# Altium PCB rf-mixer.PcbDoc
Units mil, origin at the board's own origin, x right, y up, seen from the top; angles counter-clockwise.
Board outline 1102.36 x 866.14 mil, 2 copper layers (Top Layer, Bottom Layer), stack 65.792 mil thick; 18 components, 13 nets, 57 pads, 49 vias.
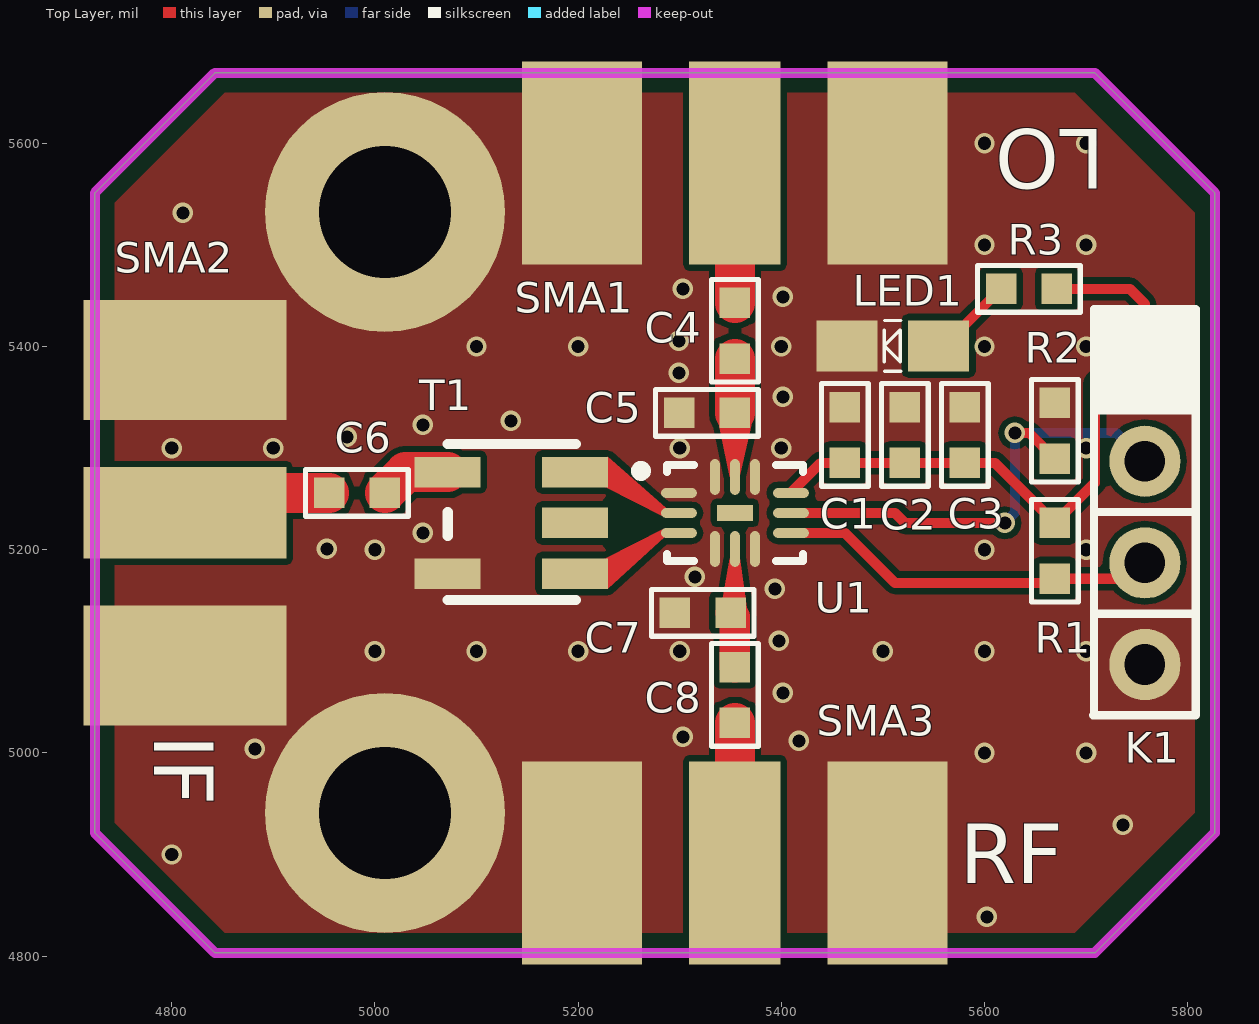
[diagram p0: Top Layer view]
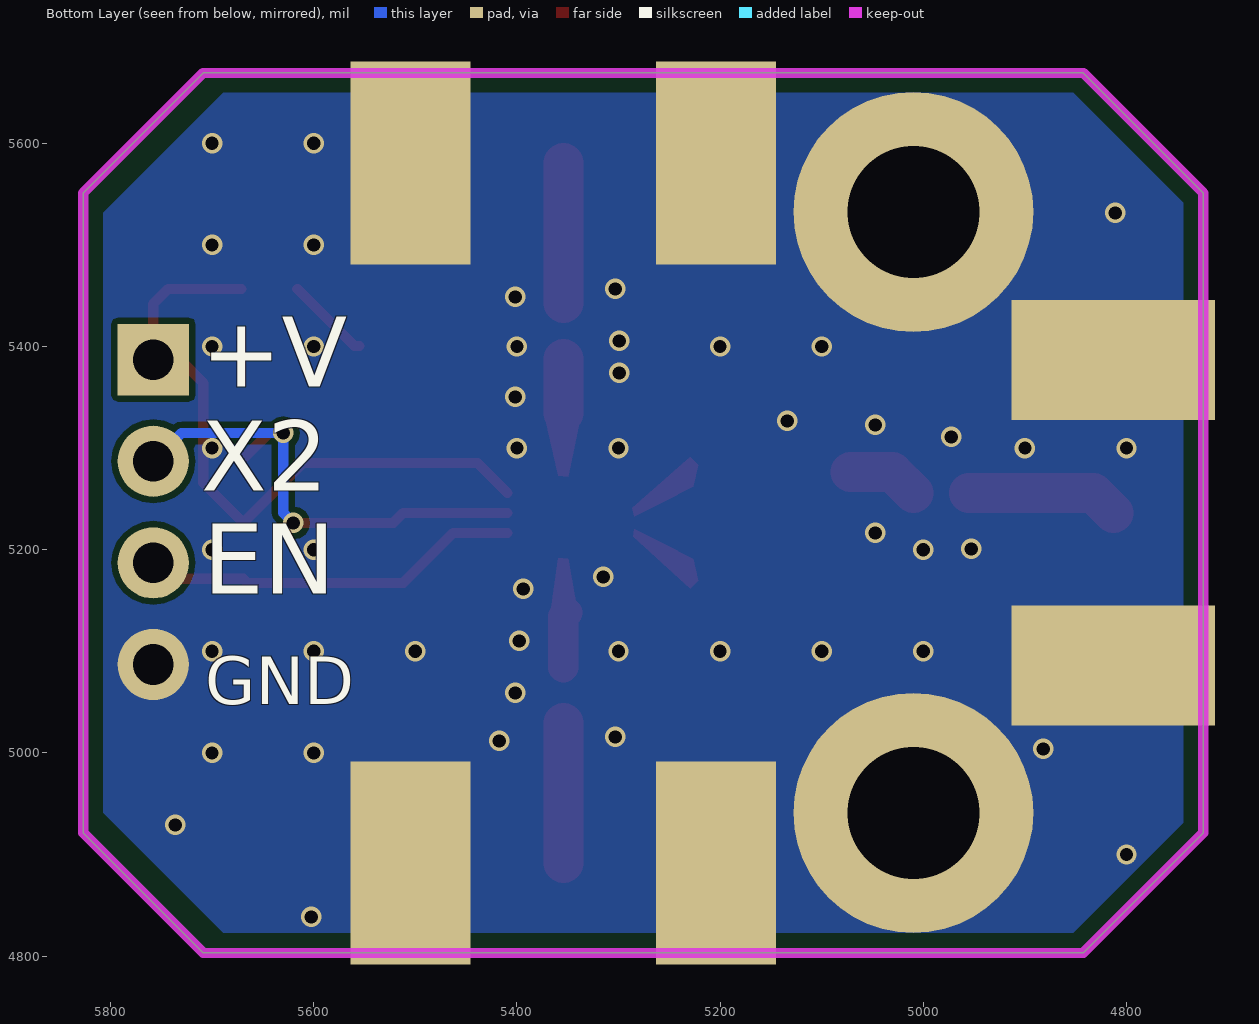
[diagram p1: Bottom Layer view, seen from below]

## Layer stack, top to bottom
Top Solder: solder mask 0.4, Solder Resist, Dk 3.5
Top Layer: signal copper 1.4
Dielectric 1: dielectric 62.9921, FR-4, Dk 4.8
Bottom Layer: signal copper 1.4
Bottom Solder: solder mask 0.4, Solder Resist, Dk 3.5

## Board outline
4724.41,4921.26 4724.41,5551.18 4842.52,5669.29 5708.66,5669.29 5826.77,5551.18 5826.77,4921.26 5708.66,4803.15 4842.52,4803.15

## Design rules (kind name [scope] priority, off if disabled: settings)
Clearance [All] p1: gap=6 ignorepadtopadclearanceinfootprint=FALSE except(0: Arc-Hole Track-Hole SMDPad-Hole THPad-Hole Via-Hole Fill-Hole Poly-Hole Region-Hole Text-Hole)
HoleSize [All] p1: absolutevalues=TRUE maxlimit=248.03 minlimit=39.37 maxpercent=80.000 minpercent=20.000
PlaneConnect [All] p1: planeconnectstyle=Direct reliefexpansion=20 reliefentries=4 reliefconductorwidth=10 reliefairgap=10
PolygonConnect [All] p1: connectstyle=Direct reliefconductorwidth=10 reliefentries=4 polygonreliefangle="90 Angle" airgapwidth=10
RoutingVias [All] p1: holewidth=13 width=20 viastyle="Through Hole" minholewidth=13 minwidth=20 maxholewidth=60 maxwidth=60
SolderMaskExpansion [All] p1: expansion=4
Width [All] p1: maxlimit=1000 minlimit=4 preferedwidth=10
28 further rules are at their usual default settings.

## Components (designator, comment, footprint, x,y, rotation, side; value= is the part's Value field where it differs from the comment)
C1 "1nF" 0603C-GENERIC 5462.6,5340.43 r270 top
C2 "10pF" 0603C-GENERIC 5521.65,5340.43 r270 top
C3 "1nF" 0603C-GENERIC 5580.71,5340.43 r270 top
C4 "10pF" 0603C-GENERIC 5354.33,5387.91 r90 top
C5 "0.15pF" 0603C-GENERIC 5299.33,5334.65 r0 top
C6 "10pF" 0603C-GENERIC 5009.84,5255.91 r180 top
C7 "0.15pF" 0603C-GENERIC 5295.28,5137.8 r0 top
C8 "10pF" 0603C-GENERIC 5354.33,5029.53 r90 top
K1 "HEADER-1X4" HEADER-1X4 5757.87,5387.01 r0 top
LED1 "Green" "0805LED - GREEN" 5509.84,5400.59 r180 top
R1 "1K" 0603R-1k 5669.29,5171.38 r90 top
R2 "1K" 0603R-1k 5669.29,5344.49 r270 top
R3 "220R" 0603R-220 5671.26,5456.69 r180 top
SMA1 "*" MOLEX_SMA_EDGE 5184.33,5580.71 r270 top
SMA2 "*" MOLEX_SMA_EDGE 4812.99,5066.22 r0 top
SMA3 "*" MOLEX_SMA_EDGE 5524.33,4891.73 r90 top
T1 "1:1 Balun" TC1-1-13M+_FOOTPRINT 5071.65,5276.38 r270 top
U1 "LTC5548" LTC5548_QFN3mmx2mm 5354.33,5236.22 r0 top

## Footprints (in the part's own frame and the unit in brackets; to place one, negate y for a bottom-side part, rotate by r counter-clockwise, add the part's x,y. Pads: shape width x height; smd on the part's side, far side on the other; paste and mask are expansions set on the pad)
0603C-GENERIC [mil] "CAPACITOR 0603"
  rect 30x30 smd: 1(0,0) 2(55,0)
  silkscreen extent -23,-23 78,23, body extent -4,-15 59,15, height 19
0603R-1k [mil] "RESISTOR 0603"
  rect 30x30 smd: 1(0,0) 2(55,0)
  silkscreen extent -23,-23 78,23, body extent -4,-15 59,15, height 20
0603R-220 [mil] "RESISTOR 0603"
  rect 30x30 smd: 1(0,0) 2(55,0)
  silkscreen extent -23,-23 78,23, body extent -4,-15 59,15, height 20
"0805LED - GREEN" [mil]
  rect 60x50 smd: A(-45,0) K(45,0)
  silkscreen extent -8,-25 9,25, body extent -45,-25 41,25, height 24
HEADER-1X4 [mil]
  rect 70x70 hole 40: 1(0,0)
  round 70 hole 40: 2(0,-100) 3(0,-200) 4(0,-300)
  silkscreen extent -51,-350 50,50, body extent -50,-350 50,50, height 470
LTC5548_QFN3mmx2mm [mm] "QFN, 12-Leads, Body 3.00x2.00mm, Pitch 0.50mm, Thermal Pad 0.75x0.50mm, IPC Medium Density"
  oval 0.9x0.25 smd: 1(-1.4,0.5) 2(-1.4,0) 3(-1.4,-0.5) 7(1.4,-0.5) 8(1.4,0) 9(1.4,0.5)
  oval 0.25x0.9 smd: 4(-0.5,-0.9) 5(0,-0.9) 6(0.5,-0.9) 10(0.5,0.9) 11(0,0.9) 12(-0.5,0.9)
  rect 0.9x0.4 smd: 13(0,0)
  silkscreen extent -2.47,-1.2 1.7,1.2, body extent -1.6,-1.1 1.6,1.1, height 0.75
MOLEX_SMA_EDGE [mm]
  rect 5.08x2.286 smd: 1(0,4.318)
  rect 5.08x3 all layers, no hole: 2(0,8.136) 2(0,0.5)
  body extent -12.24,-0.44 2.03,9.08, height 4.32
TC1-1-13M+_FOOTPRINT [mm]
  rect 0.76x1.65 smd: 1(0,3.18) 2(1.27,3.18) 3(2.54,3.18) 4(2.54,0) 6(0,0)
  silkscreen extent -0.7,0 3.2,3.2, body extent -0.7,0 3.2,3.2, height 4.06

## Part data
C1 C3: library part 0603C-1NF-50V-X7R, "CAPACITOR 0603 CERAMIC"
C2 C4 C6 C8: library part 0603C-10PF-50V-C0G-MUR, "CAPACITOR 0603 CERAMIC", Reel=C2
C5 C7: library part 0603C-0.15PF-50V-C0G, "CAPACITOR 0603 CERAMIC", Reel=C2
K1: Supplier Part Number 1=S1011E-36-ND, Supplier 1=Digi-Key
LED1: library part "0805 SMD LED - GREEN", Supplier Part Number 1=160-1426-1-ND, Supplier 1=Digi-Key
R1 R2: library part 0603R-1K, "GENERIC RESISTOR 0603", Manufacturer="Stackpole Electronics Inc", Manufacturer Part Number="RMCF 1/16 1K 1% R", Supplier Part Number 1=RMCF0603FT1K00TR-ND, Reel=R14, Supplier 1=Digi-Key
R3: library part 0603R-220, "GENERIC RESISTOR 0603", Case="0603 (1608 metric)", Manufacturer="Stackpole Electronics Inc", Manufacturer Part Number="RMCF 1/16 220 1% R", Power (Watts)="0.1W, 1/10W", Resistance In Ohms=220, Supplier Part Number=RMCF1/16220FRCT-ND, Temperature Coefficient=±100ppm/°C, Tolerance=±1%, Category=Resistors, Composition="Thick Film", Lead Style="Surface Mount (SMD - SMT)", Packaging="Cut Tape (CT)", RoHS="RoHS Compliant", Supplier=Digi-Key, Supplier 1=Digi-Key, Supplier Part Number 1=RMCF1/16220FRCT-ND
SMA1 SMA2 SMA3: library part MOLEX_SMA_EDGE, Supplier Part Number 1=WM5534-ND, Supplier 1=Digi-Key
T1: library part "TC1-1-13M+ 1:1 RF Balun"
U1: Supplier Part Number 1=LTC5548IUDB#TRMPBFCT-ND, Supplier 1=Digi-Key

## Free pads (board coordinates)
  round 236.22 hole 129.92: MNT(5009.84,4940.94) MNT(5009.84,5532.48)

## Via types
v1: diameter 20, hole 13, Top Layer to Bottom Layer, tented both sides, 49 vias

## Nets (pads, with @x,y where several pads share a name; then routed paths per layer and width w, separated by ;. In a path a pad name is that pad's centre, name@x,y a point inside that pad or via, vN(x,y) a via of type N, cw(c..) or ccw(c..) an arc to the next point about the centre after c; other vN are vias at no path point)
+3V3: C1.2 C2.2 C3.2 K1.1 R1.2 R3.1 U1.9 | length 657
  Top Layer w10: U1.9 5438.98,5285.43 C1.2 C2.2 C3.2 5610.24,5285.43 R1.2 5708.66,5265.75 5708.66,5364.17 5731.5,5387.01 K1.1 5757.87,5441.93 5743.11,5456.69 R3.1
GND: C1.1 C2.1 C3.1 C5.1 C7.1 K1.4 LED1.K pad.MNT R2.1 SMA1.2 SMA2.2 SMA3.2 T1.4 U1.1 U1.4 U1.6 U1.10 U1.12
  other v1: 5602.36,4838.58 4800,4900 5736.22,4929.13 5600,5000 5700,5000 4881.89,5003.94 5417.32,5011.81 5303.15,5015.75 5401.57,5059.06 5000,5100 5100,5100 5200,5100 5300,5100 5500,5100 5600,5100 5700,5100 5397.64,5110.24 5393.7,5161.42 5314.96,5173.23 5000,5200 5600,5200 5700,5200 4952.76,5200.79 5047.24,5216.54 4800,5300 4900,5300 5300,5300 5400,5300 5700,5300 4972.44,5311.02 5047.24,5322.83 5133.86,5326.77 5401.57,5350.39 5299.21,5374.02 5100,5400 5200,5400 5400,5400 5600,5400 5700,5400 5299.21,5405.51 5401.57,5448.82 5303.15,5456.69 5600,5500 5700,5500 4811.02,5531.5 5600,5600 5700,5600
NetC4_1: C4.1 C5.2 U1.11 | length 53.3
  Top Layer w39.37: C5.2 C4.1
NetC4_2: C4.2 SMA1.1 | length 137.8
  Top Layer w39.37: C4.2 SMA1.1
NetC6_1: C6.1 T1.6 | length 70.3
  Top Layer w39.37: C6.1 5030.31,5276.38 T1.6
NetC6_2: C6.2 SMA2.1 | length 150
  Top Layer w39.37: SMA2.1 4832.68,5255.91 C6.2
NetC7_2: C7.2 C8.2 U1.5 | length 54.9
  Top Layer w30.12: C7.2 5354.33,5133.74 C8.2
NetC8_1: C8.1 SMA3.1 | length 137.8
  Top Layer w39.37: SMA3.1 C8.1
NetK1_2: K1.2 R2.2 U1.8 | length 496.8
  Top Layer w10: U1.8 5511.81,5236.22 5521.65,5226.38 v1(5620.08,5226.38) ; v1(5629.91,5314.95) 5643.83,5314.95 R2.2
  Bottom Layer w10: v1(5620.08,5226.38) 5629.93,5236.23 v1(5629.91,5314.95) 5729.93,5314.95 K1.2
NetK1_3: K1.3 R1.1 U1.7 | length 377
  Top Layer w10: U1.7 5462.6,5216.54 5511.81,5167.32 5665.24,5167.32 R1.1 5742.24,5171.38 K1.3
NetLED1_A: LED1.A R3.2 | length 84.7
  Top Layer w10: LED1.A 5560.16,5400.59 R3.2
NetT1_1: T1.1 U1.2
NetT1_3: T1.3 U1.3
pads on no net: T1.2 U1.13

## Polygon pours and split planes (outlines as drawn)
GND on Bottom Layer "GND_BOTTOM" (solid, pour order 0): 4744.09,4931.1 4852.36,4822.83 5688.98,4822.83 5807.09,4940.94 5807.09,5531.5 5688.98,5649.61 4852.36,5649.61 4744.09,5541.34
GND on Top Layer "GND_TOP" (solid, pour order 2): 4744.09,4931.1 4852.36,4822.83 5688.98,4822.83 5807.09,4940.94 5807.09,5531.5 5688.98,5649.61 4852.36,5649.61 4744.09,5541.34

## Keep-outs
Keep-Out Layer:
  lines w10: 4724.41,4921.26 4724.41,5551.18 4842.52,5669.29 4891.73,5669.29 5708.66,5669.29 5826.77,5551.18 5826.77,4921.26 5708.66,4803.15 4842.52,4803.15 4724.41,4921.26

## Other copper
Top Layer:
  region net NetC7_2: 5359.25,5191.93 5367.13,5135.83 5339.57,5135.83 5339.57,5134.84 5349.41,5190.94
  region net NetC4_1: 5349.41,5271.96 5337.6,5329.05 5354.33,5334.65 5372.05,5329.05 5359.25,5272.95
  region net NetT1_1: 5226.38,5261.81 5284.45,5232.28 5286.42,5241.14 5229.33,5291.34 5221.46,5283.46
  region net NetT1_3: 5226.38,5190.94 5284.45,5220.47 5285.43,5212.6 5229.33,5161.42 5221.46,5169.29

## Silkscreen, mask and mechanical layers (free items; w line width, h text height)
Top Overlay:
  text "LO" at 5718.5,5632.87 h100 r180
  text "IF" at 4763.78,5017.72 h100 r270
  text "RF" at 5575.79,4852.36 h100
Bottom Overlay:
  text "+V" at 5710.63,5337.6 h118.11
  text "X2" at 5710.63,5235.24 h118.11
  text "EN" at 5708.66,5133.86 h118.11
  text "GND" at 5706.69,5032.48 h80
Bottom Solder:
  text "sebholzapfel.com" at 5531.5,5340.55 h80
  text "2-14GHz" at 5477.36,5214.57 h118.11
  text "RF MIXER" at 5454.72,5124.02 h100